# Altium PCB PCB_Nixie Clock Component_2021-09-03.pcbdoc
Units mil, origin at the board's own origin, x right, y up, seen from the top; angles counter-clockwise.
Board outline 6186.6 x 3360.23 mil, 2 copper layers (Top Layer, Bottom Layer); 27 components, 69 nets, 164 pads, 28 vias.
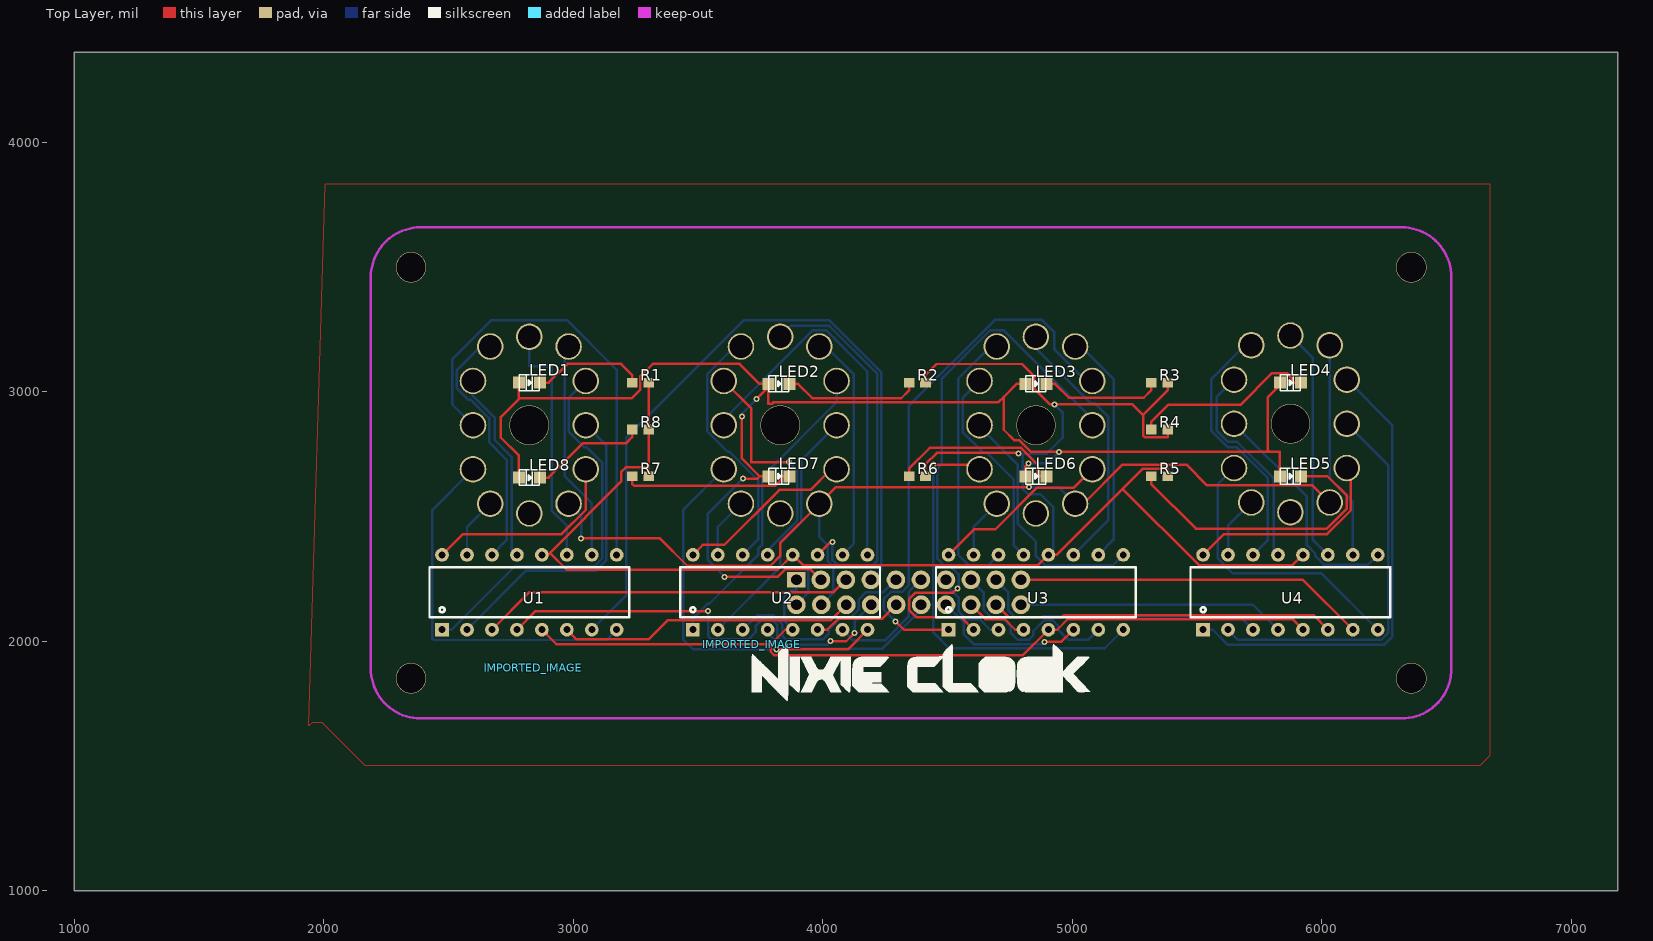
[diagram p0: Top Layer view]
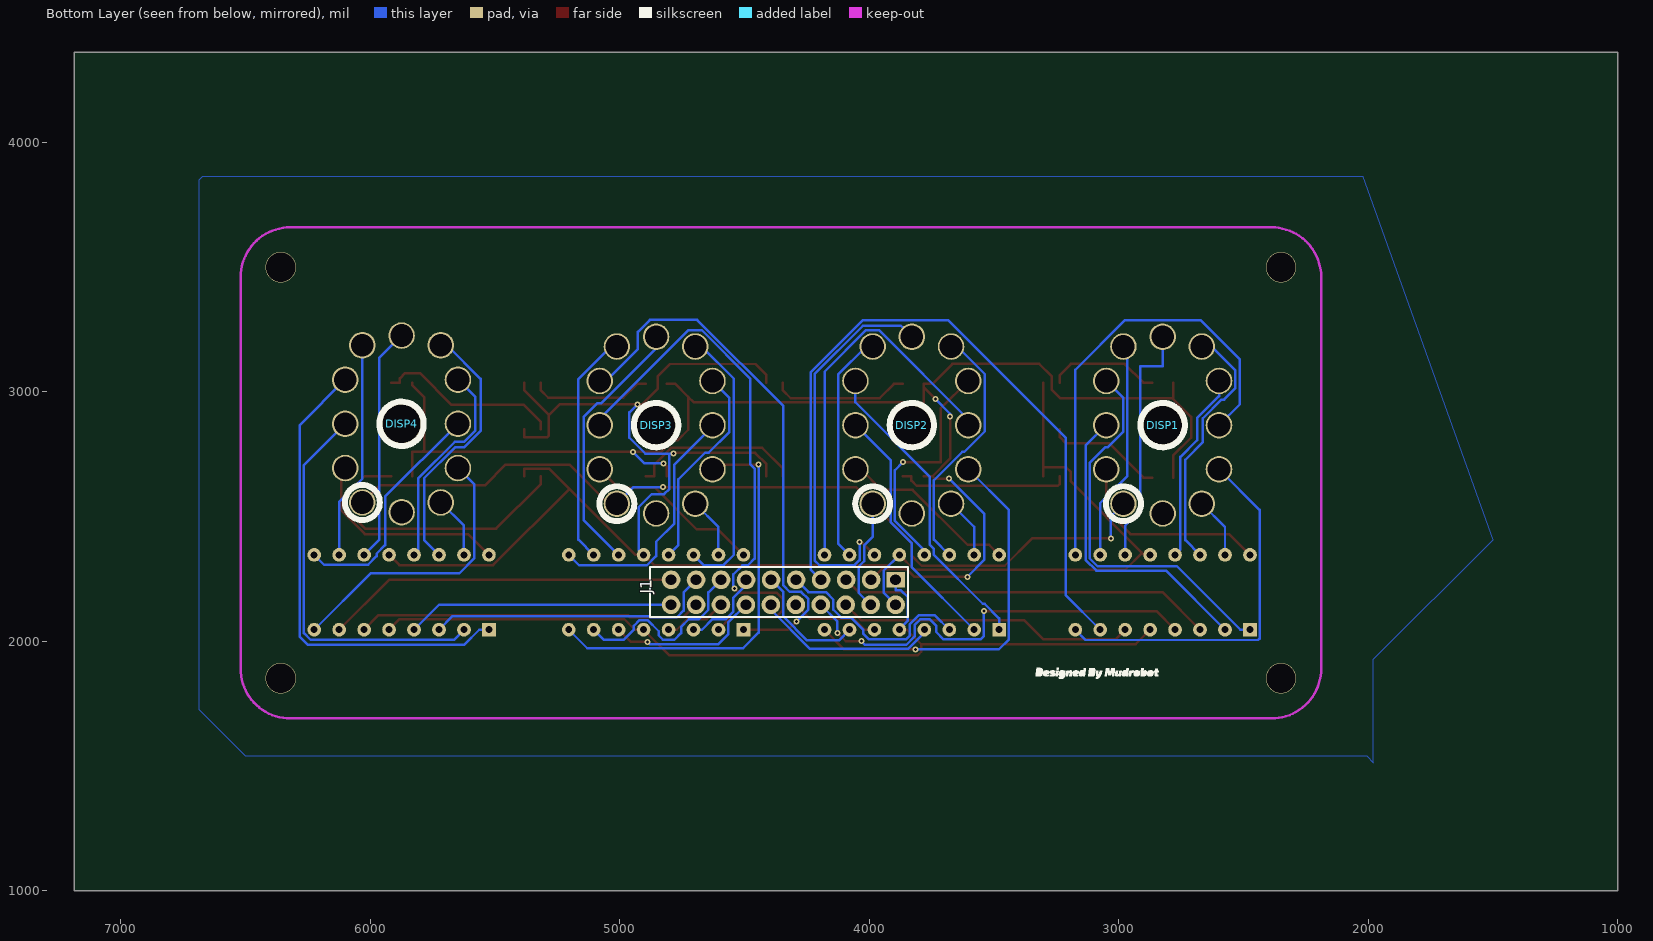
[diagram p1: Bottom Layer view, seen from below]

## Layer stack, top to bottom
Top Layer: signal copper (thickness not stored)
Dielectric: dielectric 12.6, FR-4, Dk 4.8
Bottom Layer: signal copper (thickness not stored)

## Board outline
7186.6,1000 1000,1000 1000,4360.23 7186.6,4360.23

## Components (designator, comment, footprint, x,y, rotation, side; value= is the part's Value field where it differs from the comment)
DISP1 "DISP_IN12A" "IN12A FINAL EDITION" 2824.41,2865.51 r0 bottom
DISP2 "DISP_IN12A" "IN12A FINAL EDITION" 3829.41,2865.51 r0 bottom
DISP3 "DISP_IN12A" "IN12A FINAL EDITION" 4854.41,2865.51 r0 bottom
DISP4 "DISP_IN12A" "IN12A FINAL EDITION" 5874.41,2870.51 r0 bottom
IMPORTED_IMAGE "IMPORTED_IMAGE" IMPORTED_IMAGE 2839.68,1892.71 r0 top
IMPORTED_IMAGE "IMPORTED_IMAGE" IMPORTED_IMAGE 3715.2,1987.84 r0 top
J1 "2.54MM,2×10双排针" 2*10P 4304.41,2220.51 r270 bottom
LED1 "17-21/BHC-AP1Q2/3T" LED_0805 2824.41,3035.51 r0 top
LED2 "17-21/BHC-AP1Q2/3T" LED_0805 3824.41,3030.51 r0 top
LED3 "17-21/BHC-AP1Q2/3T" LED_0805 4854.41,3030.51 r0 top
LED4 "17-21/BHC-AP1Q2/3T" LED_0805 5874.41,3035.51 r0 top
LED5 "17-21/BHC-AP1Q2/3T" LED_0805 5874.41,2660.51 r0 top
LED6 "17-21/BHC-AP1Q2/3T" LED_0805 4854.41,2660.51 r0 top
LED7 "17-21/BHC-AP1Q2/3T" LED_0805 3824.41,2660.51 r0 top
LED8 "17-21/BHC-AP1Q2/3T" LED_0805 2824.41,2655.51 r0 top
R1 "510" 0603-RES 3269.41,3035.51 r0 top
R2 "510" 0603-RES 4379.41,3035.51 r0 top
R3 "510" 0603-RES 5349.41,3035.51 r0 top
R4 "510" 0603-RES 5349.41,2848.01 r0 top
R5 "510" 0603-RES 5349.41,2660.51 r0 top
R6 "510" 0603-RES 4379.41,2660.51 r0 top
R7 "510" 0603-RES 3269.41,2660.51 r0 top
R8 "510" 0603-RES 3269.41,2848.01 r0 top
U1 "K155ID1/SN74141" DIP16 2824.41,2195.51 r0 top
U2 "K155ID1/SN74141" DIP16 3829.41,2195.51 r0 top
U3 "K155ID1/SN74141" DIP16 4854.41,2195.51 r0 top
U4 "K155ID1/SN74141" DIP16 5874.41,2195.51 r0 top

## Footprints (in the part's own frame and the unit in brackets; to place one, negate y for a bottom-side part, rotate by r counter-clockwise, add the part's x,y. Pads: shape width x height; smd on the part's side, far side on the other; paste and mask are expansions set on the pad)
2*10P [mm]
  rect 1.575x1.9 hole 1.1: 1(-0.635,10.414)
  round 1.9 hole 1.1: 2(1.905,10.414) 3(-0.635,7.919) 4(1.905,7.874) 5(-0.635,5.373) 6(1.905,5.334) 7(-0.635,2.828) 8(1.905,2.794) 9(-0.635,0.282) 10(1.905,0.254) 11(-0.635,-2.263) 12(1.905,-2.286) 13(-0.635,-4.809) 14(1.905,-4.826) 15(-0.635,-7.355) 16(1.905,-7.366) 17(-0.635,-9.9) 18(1.905,-9.906) 19(-0.635,-12.446) 20(1.905,-12.446)
  silkscreen extent -1.93,-14.6 3.15,11.66
0603-RES [mil]
  rect 43.3x39.4 smd: 1(-33,0) 2(33,0)
DIP16 [mil]
  rect 55x55 hole 28: 1(-350,-150)
  round 55 hole 28: 2(-250,-150) 3(-150,-150) 4(-50,-150) 5(50,-150) 6(150,-150) 7(250,-150) 8(350,-150) 9(350,150) 10(250,150) 11(150,150) 12(50,150) 13(-50,150) 14(-150,150) 15(-250,150) 16(-350,150)
  silkscreen extent -400,-100 400,100
IMPORTED_IMAGE [mil]
"IN12A FINAL EDITION" [mil]
  round 106.3 hole 90.6: 1(157,315) 2(226,177) 3(226,0) 4(226,-177) 5(157,-315) 6(0,-354) 7(-157,-315) 8(-226,-177) 9(-226,0) 10(-226,177) 11(-157,315) 12(0,354)
  silkscreen extent -89,-89 227,385
LED_0805 [mil]
  rect 48x48 smd: 1(-42,0) 2(42,0)
  silkscreen extent -40,-32 40,32

## Via types
v1: diameter 24.02, hole 12.01, Top Layer to Bottom Layer, 18 vias
v2: diameter 157.48, hole 153.54, Top Layer to Bottom Layer, 4 vias
v3: diameter 122.05, hole 118.11, Top Layer to Bottom Layer, 4 vias
v4: diameter 24, hole 12, Top Layer to Bottom Layer, 2 vias

## Nets (pads, with @x,y where several pads share a name; then routed paths per layer and width w, separated by ;. In a path a pad name is that pad's centre, name@x,y a point inside that pad or via, vN(x,y) a via of type N, cw(c..) or ccw(c..) an arc to the next point about the centre after c; other vN are vias at no path point)
+5V: J1.1 U1.5 U2.5 U3.5 U4.5 | length 3545.5
  Top Layer w10: U1.5 2932.71,1987.21 3791.55,1987.21 ; U2.5 3849.85,2045.51 3791.55,1987.21 ; U4.5 5882.25,2087.67 4981.93,2087.67 4939.77,2045.51 U3.5 4802.55,1943.65 3805.07,1943.65 3791.55,1957.17 3791.55,1987.21
  Bottom Layer w10: U2.5 3879.41,2048.86 3845.51,2082.76 3845.51,2175.57 3873.38,2203.44 3894.41,2203.44 J1.1
GND: J1.2 R1.2 R2.2 R3.2 R4.2 R5.2 R6.2 R7.2 R8.2 U1.12 U2.12 U3.12 U4.12 | length 7540.6
  Top Layer w10: U1.12 2898.25,2345.51 2906.5,2353.76 ; R7.2 3302.41,2696.62 ; R1.2 R8.2 3302.41,2696.62 ; R6.2 4412.41,2691.28 4412.41,2709.23 4457.46,2754.28 4780.66,2754.28 v1(4784.09,2750.85) ; R2.2 4412.41,3066.28 4456.57,3110.44 4799.03,3110.44 4847.49,3061.98 4847.49,3012.07 4911.25,2948.31 v1(4929.51,2948.31) 5241.4,2948.31 5283.69,2906.02 ; R5.2 5382.41,2691.28 5283.24,2691.28 5201.76,2609.8 ; R4.2 5382.41,2817.24 5290.18,2817.24 5283.69,2823.73 5283.69,2906.02 ; R3.2 5382.41,3004.74 5283.69,2906.02 ; U4.12 5883.08,2304.18 5507.38,2304.18 5201.76,2609.8 ; 2906.5,2353.76 3192.28,2639.54 3192.28,2677.63 3211.27,2696.62 3302.41,2696.62 ; 2906.5,2353.76 2974.28,2285.98 3819.88,2285.98 U2.12 3920.48,2304.44 4863.34,2304.44 U3.12 4937.47,2345.51 5201.76,2609.8
  Bottom Layer w10: U2.12 3942.89,2282.03 3942.89,2193.99 J1.2 ; U3.12 4924.14,2365.24 4924.14,2536.46 4871.83,2588.77 4822.3,2588.77 4801,2610.07 4801,2750.85 v1(4784.09,2750.85) 4897.31,2750.85 4961.41,2814.96 4961.41,2916.41 v1(4929.51,2948.31)
H1_0: DISP2.2 U2.16 | length 718.1
  Top Layer w10: U2.16 3519.78,2385.88 3606.24,2385.88 3826.65,2606.29 3951.36,2606.29 4033.58,2688.51 DISP2.2
H1_1: DISP2.11 U2.15 | length 243.5
  Bottom Layer w10: U2.15 3579.41,2457.51 DISP2.11
H1_2: DISP2.10 U2.8 | length 1536.8
  Top Layer w10: v1(3814.63,1966.73) 4100.63,1966.73 U2.8
  Bottom Layer w10: DISP2.10 3440.83,2525.93 3440.83,2006.93 3481.02,1966.74 v1(3814.63,1966.73)
H1_3: DISP2.9 U2.9 | length 1550.2
  Bottom Layer w10: DISP2.9 3603.41,2888.34 3961.44,3246.37 4012.4,3246.37 4179.41,3079.36 U2.9
H1_4: DISP2.8 U2.13 | length 956.4
  Top Layer w10: DISP2.8 3713.78,2932.15 3713.78,2717.32 v1(3864.96,2717.32)
  Bottom Layer w10: U2.13 3779.41,2363.77 3897.66,2482.03 3897.66,2684.62 v1(3864.96,2717.32)
H1_5: DISP2.7 U2.14 | length 1020.2
  Bottom Layer w10: DISP2.7 3647.6,3180.51 3537.12,3070.03 3537.12,2840.24 3618.58,2758.78 3626.75,2758.78 3740.83,2644.7 3740.83,2406.93 U2.14
H1_6: DISP2.6 U2.11 | length 1584.9
  Top Layer w10: U2.11 4031.39,2397.49 v1(4038.88,2397.49)
  Bottom Layer w10: DISP2.6 3873.54,3263.64 4025.19,3263.64 4218.95,3069.88 4218.95,2323.03 4200.43,2304.51 4058.96,2304.51 4038.88,2324.59 v1(4038.88,2397.49)
H1_7: DISP2.5 U2.10 | length 926
  Bottom Layer w10: DISP2.5 4012.04,3180.51 4124.66,3067.89 4124.66,2390.76 U2.10
H1_8: DISP2.4 U2.1 | length 1239.7
  Bottom Layer w10: U2.1 3479.41,2084.08 3479.41,2091.11 3538.11,2149.71 3545.11,2149.71 3740.81,2345.51 3740.81,2369.61 3757.91,2386.71 3757.91,2659.51 4055.41,2957.01 DISP2.4
H1_9: DISP2.3 U2.2 | length 1017.2
  Bottom Layer w10: U2.2 3829.41,2295.51 3829.41,2391.01 3913.75,2475.35 3913.75,2723.85 DISP2.3
H1_A: J1.9 U2.3 | length 836.4
  Bottom Layer w10: U2.3 3737.12,2103.22 3802.29,2103.22 3837.4,2068.11 3837.4,2022.14 3852.61,2006.93 4001.87,2006.93 4023.69,2028.75 4023.69,2045.17 4072.9,2094.38 4112.39,2094.38 4144.41,2126.4 4144.41,2166.33 4174.25,2196.17 4243.96,2196.17 J1.9
H1_B: J1.10 U2.6 | length 356.4
  Top Layer w10: U2.6 4017.18,2045.51 4060.61,2088.94 4237.84,2088.94 J1.10
H1_C: J1.11 U2.7 | length 489.7
  Bottom Layer w10: U2.7 4121.94,2002.98 4249.14,2002.98 4344.41,2098.25 4344.41,2196.4 J1.11
H1_D: J1.12 U2.4 | length 738.2
  Bottom Layer w10: U2.4 3779.41,2034.6 3845.34,1968.67 4237.59,1968.67 4394.41,2125.49 J1.12
H2_0: DISP1.2 U1.16 | length 813.4
  Top Layer w10: U1.16 2557.74,2428.84 2953.51,2428.84 3050.41,2525.74 DISP1.2
H2_1: DISP1.11 U1.15 | length 243.5
  Bottom Layer w10: U1.15 2574.41,2457.51 DISP1.11
H2_2: DISP1.10 U1.8 | length 1503.9
  Bottom Layer w10: DISP1.10 2435.83,2525.93 2435.83,2009.86 2441.37,2004.32 3133.22,2004.32 U1.8
H2_3: DISP1.9 U1.9 | length 1846.2
  Bottom Layer w10: DISP1.9 2514.77,2949.15 2514.77,3127.75 2673.42,3286.4 2974.79,3286.4 3174.41,3086.78 U1.9
H2_4: DISP1.8 U1.13 | length 769.9
  Bottom Layer w10: DISP1.8 2598.41,2981.51 2686.22,2893.7 2686.22,2804.72 2753.15,2737.79 2753.15,2366.78 U1.13
H2_5: DISP1.7 U1.14 | length 1026.7
  Bottom Layer w10: DISP1.7 2628.51,3180.51 2532.71,3084.21 2532.71,3013.81 2578.31,2968.11 2587.81,2968.11 2663.01,2892.91 2663.01,2797.21 2733.51,2726.81 2733.51,2404.61 U1.14
H2_6: DISP1.6 U1.11 | length 989.2
  Bottom Layer w10: DISP1.6 2824.41,3100.81 2914.91,3100.81 2914.91,2521.61 2974.41,2462.21 U1.11
H2_7: DISP1.5 U1.10 | length 886.9
  Bottom Layer w10: DISP1.5 2965.32,3164.42 2965.32,2661.76 3074.41,2552.67 U1.10
H2_8: DISP1.4 U1.1 | length 1561.3
  Bottom Layer w10: U1.1 2512.98,2045.51 2767.27,2299.8 3084.68,2299.8 3116.72,2331.84 3116.72,2713.04 3052.75,2777.01 3044.07,2777.01 2981.41,2839.67 2981.41,2973.51 DISP1.4
H2_9: DISP1.3 U1.2 | length 1248.7
  Bottom Layer w10: U1.2 2811.08,2282.18 3089.82,2282.18 3132.81,2325.17 3132.81,2783.11 DISP1.3
H2_A: J1.5 U1.3 | length 1501.3
  Top Layer w10: U1.3 2825.19,2196.29 4043.63,2196.29 J1.5
H2_B: J1.6 U1.6 | length 1193.4
  Top Layer w10: U1.6 3012.99,2006.93 3302.24,2006.93 3379.4,2084.09 4032.99,2084.09 J1.6
H2_C: J1.7 U1.7 | length 2978.5
  Bottom Layer w10: U1.7 3212.99,2184.09 3212.99,2815.13 3682.86,3285 4026.59,3285 4235.04,3076.55 4235.04,2287.47 J1.7
H2_D: J1.8 U1.4 | length 1766.1
  Top Layer w10: U1.4 2848.77,2119.87 v1(3540.83,2119.87) ; v1(4031.43,1999.4) 4094.34,1999.4 v1(4127.38,2032.44)
  Bottom Layer w10: v1(3540.83,2119.87) 3540.83,2021.05 3554.95,2006.93 3701.87,2006.93 3732.42,2037.48 3732.42,2062.31 3757.24,2087.13 3795.62,2087.13 3817.98,2064.77 3817.98,2018.79 3852.01,1984.76 4016.79,1984.76 v1(4031.43,1999.4) ; v1(4127.38,2032.44) 4127.38,2078.48 J1.8
HV: DISP1.1 DISP2.1 DISP3.1 DISP4.1 J1.4 | length 3970.3
  Top Layer w10: v1(3031.51,2411.21) 3347.79,2411.21 3456.93,2302.07 3790.63,2302.07 3829.42,2340.86 3829.42,2393.52 DISP2.1 4052.9,2617 v1(4827.24,2617) ; DISP3.1 5044.38,2550.51 5201.35,2707.48 5457.16,2707.48 5540.36,2624.28 5962.63,2624.28 DISP4.1
  Bottom Layer w10: DISP1.1 3031.51,2500.41 v1(3031.51,2411.21) ; DISP2.1 3986.41,2417.32 4020.92,2382.81 4020.92,2319.78 4042.74,2297.96 4042.74,2193.84 J1.4 ; v1(4827.24,2617) 4944.91,2617 DISP3.1
LED0: J1.3 LED1.1 LED2.1 LED3.1 LED4.1 LED5.1 LED6.1 LED7.1 LED8.1 | length 6117.8
  Top Layer w10: LED8.1 2782.41,2743.17 2710.63,2814.96 2710.63,2898.42 2782.41,2970.21 LED1.1 2782.41,2972.36 3234.38,2972.36 3269.68,3007.66 3269.68,3061.88 3318.76,3110.96 3666.89,3110.96 3747.34,3030.51 LED2.1 ; v1(3607.36,2257.47) 3818.94,2257.47 3849.06,2287.59 3950.55,2287.59 J1.3 ; v4(3675.98,2899.6) 3675.98,2731.89 3747.36,2660.51 ; v1(3680.43,2651.05) 3737.88,2651.05 3747.34,2660.51 ; v4(3734.64,2969.68) 3782.41,3017.45 LED2.1 ; 3796.81,2950.81 3802.31,2956.31 4703.11,2956.31 4725.91,2979.11 4777.34,3030.51 LED3.1 ; 3796.91,2950.81 3782.67,2950.78 LED2.1 ; 4725.58,2976.38 4725.58,2846.85 4767.32,2805.11 4787.4,2805.11 4834.34,2758.17 v1(4946.81,2758.17) 5832.41,2758.17 LED5.1 ; LED6.1 4812.41,2700.5 v1(4824.08,2712.17) ; 5789.71,2761.01 5783.81,2761.01 5783.81,2977.91 5832.41,3026.51 LED4.1 ; 3747.36,2660.51 LED7.1 3747.34,2660.51
  Bottom Layer w10: v1(3607.36,2257.47) 3538.7,2326.13 3538.7,2509.32 v1(3680.43,2651.05) ; v4(3675.98,2899.6) 3675.98,2911.02 v4(3734.64,2969.68) ; v1(4824.08,2712.17) 4900.81,2712.17 v1(4946.81,2758.17)
LED1_2: LED1.2 R1.1 | length 450.5
  Top Layer w10: LED1.2 2901.48,3035.51 2976.95,3110.98 3191.71,3110.98 3236.41,3066.28 R1.1
LED2_2: LED2.2 R2.1 | length 547.6
  Top Layer w10: LED2.2 3901.48,3030.51 3958.85,2973.14 4314.81,2973.14 4346.41,3004.74 R2.1
LED3_2: LED3.2 R3.1 | length 486
  Top Layer w10: LED3.2 4931.48,3030.51 4986.91,2975.08 5286.75,2975.08 5316.41,3004.74 R3.1
LED4_2: LED4.2 R4.1 | length 738
  Top Layer w10: R4.1 5316.41,2878.78 5384.49,2946.86 5673.77,2946.86 5801.12,3074.21 5860.17,3074.21 5881.34,3053.04 5881.34,3035.51 LED4.2
M1_0: DISP4.2 U4.16 | length 842.1
  Top Layer w10: U4.16 5607.73,2428.83 6021.16,2428.83 6116.49,2524.16 6116.49,2677.42 DISP4.2
M1_1: DISP4.11 U4.15 | length 248.5
  Bottom Layer w10: U4.15 5624.41,2462.52 DISP4.11
M1_2: DISP4.10 U4.8 | length 1149.3
  Bottom Layer w10: DISP4.10 5582.49,2627.6 5582.49,2332.18 5643.1,2271.57 5998.35,2271.57 U4.8
M1_3: DISP4.9 U4.9 | length 945.9
  Bottom Layer w10: DISP4.9 5940.25,2578.66 5940.25,2384.24 5974.42,2350.07 5974.42,2340.25 6008.76,2305.91 6184.81,2305.91 U4.9
M1_4: DISP4.8 U4.13 | length 854.2
  Bottom Layer w10: DISP4.8 5578.71,2977.82 5578.71,2843.92 5624.54,2798.09 5661.29,2798.09 5808.26,2651.12 5808.26,2361.66 U4.13
M1_5: DISP4.7 U4.14 | length 1060.7
  Bottom Layer w10: DISP4.7 5692.79,3185.51 5557.66,3050.38 5557.66,2842.2 5623.52,2776.34 5660.28,2776.34 5784.13,2652.49 5784.13,2405.23 U4.14
M1_6: DISP4.6 U4.11 | length 941.1
  Bottom Layer w10: DISP4.6 5964.38,3134.53 5964.38,2405.54 U4.11
M1_7: DISP4.5 U4.10 | length 878.5
  Bottom Layer w10: DISP4.5 6031.4,2650.69 6124.41,2557.68 U4.10
M1_8: DISP4.4 U4.1 | length 1900.6
  Bottom Layer w10: U4.1 5562.98,2045.51 5622.31,1986.18 6251.1,1986.18 6282.02,2017.1 6282.02,2865.89 DISP4.4
M1_9: DISP4.3 U4.2 | length 1576.2
  Bottom Layer w10: U4.2 5664.95,2004.97 6238.47,2004.97 6265.79,2032.29 6265.79,2705.12 DISP4.3
M1_A: J1.17 U4.3 | length 1159.7
  Bottom Layer w10: J1.17 4744.3,2195.4 4744.3,2122.48 4771.35,2095.43 4877.03,2095.43 4881.77,2100.17 5669.75,2100.17 U4.3
M1_B: J1.18 U4.6 | length 1378.1
  Top Layer w10: J1.18 4744.2,2095.72 4959.16,2095.72 4967.2,2103.76 5966.16,2103.76 U4.6
M1_C: J1.19 U4.7 | length 1412.8
  Top Layer w10: J1.19 5924.41,2245.51 U4.7
M1_D: J1.20 U4.4 | length 1071.4
  Bottom Layer w10: J1.20 5724.41,2145.51 U4.4
M2_0: DISP3.2 U3.16 | length 718.1
  Top Layer w10: U3.16 4606.2,2447.3 4691.48,2447.3 4858.92,2614.74 5006.63,2614.74 DISP3.2
M2_1: DISP3.11 U3.15 | length 243.5
  Bottom Layer w10: U3.15 4604.41,2457.52 DISP3.11
M2_2: DISP3.10 U3.8 | length 1684.3
  Top Layer w10: v1(4443.32,2707.5) 4609.41,2707.5 DISP3.10
  Bottom Layer w10: v1(4443.32,2707.5) 4443.32,2033.68 4505.56,1971.44 5130.34,1971.44 U3.8
M2_3: DISP3.9 U3.9 | length 1001.3
  Bottom Layer w10: DISP3.9 4628.4,2859.71 4780.73,2707.38 4780.73,2471.94 4854.42,2398.25 4854.42,2340.69 4891.65,2303.46 5162.36,2303.46 U3.9
M2_4: DISP3.8 U3.13 | length 834.6
  Bottom Layer w10: DISP3.8 4560.42,2974.53 4560.42,2838.29 4643.83,2754.88 4658.13,2754.88 4764.62,2648.39 4764.62,2385.3 U3.13
M2_5: DISP3.7 U3.14 | length 1108.9
  Bottom Layer w10: DISP3.7 4671.82,3180.51 4542.99,3051.68 4542.99,2345.78 4583.94,2304.83 4663.73,2304.83 U3.14
M2_6: DISP3.6 U3.11 | length 1061.8
  Bottom Layer w10: DISP3.6 4854.4,3172.79 5073.18,2954.01 5089.32,2954.01 5144.74,2898.59 5144.74,2485.84 U3.11
M2_7: DISP3.5 U3.10 | length 938.4
  Bottom Layer w10: DISP3.5 5035.24,3180.51 5165.83,3049.92 5165.83,2406.93 U3.10
M2_8: DISP3.4 U3.1 | length 2197.6
  Top Layer w10: v1(4292.38,2078.91) 4325.78,2045.51 U3.1
  Bottom Layer w10: v1(4292.38,2078.91) 4244.41,2126.88 4244.41,2168.29 4273.15,2197.03 4318.71,2197.03 4344.43,2222.75 4344.43,2941.74 4689.93,3287.24 4879.02,3287.24 4926.9,3239.36 4926.9,3170.3 5054.69,3042.51 DISP3.4
M2_9: DISP3.3 U3.2 | length 2300.3
  Top Layer w10: v1(4539.64,2211.37) 4522.26,2193.99 4371.78,2193.99 4345.93,2168.14 4345.93,2124.45 4374.12,2096.26 4553.66,2096.26 U3.2
  Bottom Layer w10: v1(4539.64,2211.37) 4545.15,2216.88 4545.15,2267.15 4508.82,2303.48 4486.91,2303.48 4459.73,2330.66 4459.73,2691.26 4477.79,2709.32 4477.79,3052.33 4671.45,3245.99 4724.51,3245.99 5080.4,2890.1 DISP3.3
M2_A: J1.13 U3.3 | length 338.4
  Bottom Layer w10: J1.13 4493.74,2224.64 4544.41,2173.97 4544.41,2118.28 4575.02,2087.67 4628.59,2087.67 4670.75,2045.51 U3.3
M2_B: J1.14 U3.6 | length 627.2
  Top Layer w10: v1(4888.34,1996.43) 4955.33,1996.43 U3.6
  Bottom Layer w10: J1.14 4565.83,2074.09 4565.83,2026.75 4605.05,1987.53 4879.44,1987.53 v1(4888.34,1996.43)
M2_C: J1.15 U3.7 | length 765.4
  Bottom Layer w10: J1.15 4644.41,2195.07 4644.41,2125.58 4682.6,2087.39 4723.57,2087.39 4754.41,2056.55 4754.41,2031.73 4780.82,2005.32 4826.76,2005.32 4843.82,2022.38 4843.82,2039.46 4888.44,2084.08 4920.39,2084.08 4942.98,2061.49 4942.98,2046.32 4983.3,2006 5064.9,2006 U3.7
M2_D: J1.16 U3.4 | length 251.4
  Top Layer w10: J1.16 4652.25,2087.67 4729.48,2087.67 4771.64,2045.51 U3.4
R5_1: LED5.2 R5.1 | length 1190.2
  Top Layer w10: R5.1 5316.41,2629.74 5495.42,2450.73 6020.3,2450.73 6100.4,2530.83 6100.4,2582.72 6022.61,2660.51 LED5.2
R6_1: LED6.2 R6.1 | length 689.6
  Top Layer w10: R6.1 4346.41,2691.28 4429.09,2773.96 4794.94,2773.96 4861.34,2707.56 4861.34,2660.51 LED6.2
R7_1: LED7.2 R7.1 | length 689.9
  Top Layer w10: R7.1 3236.41,2629.74 3243.76,2622.39 3810.75,2622.39 3831.34,2642.98 3831.34,2660.51 LED7.2
R8_1: LED8.2 R8.1 | length 467.8
  Top Layer w10: LED8.2 2901.48,2655.51 3037.95,2791.98 3211.15,2791.98 3236.41,2817.24 R8.1
S$2821: 
pads on no net: DISP1.12 DISP2.12 DISP3.12 DISP4.12
copper on no net:
  other v2: 2824.41,2865.51 3829.41,2865.51 4854.4,2865.51 5874.4,2870.51
  other v3: 2350,1850.79 6359.45,1850.79 2350,3498.03 6359.45,3498.03

## Polygon pours and split planes (outlines as drawn)
GND on Bottom Layer (solid): 2020.08,3860.23 6673.22,3860.23 6686.6,3846.84 6686.6,1726.77 6499.99,1540.16 2006.69,1540.16 1979.92,1513.38 1979.92,1926.77 1500,2406.69
GND on Top Layer (solid): 2006.69,3833.46 6673.22,3833.46 6673.22,1539.76 6633.45,1500 2166.93,1500 1993.31,1673.62 1953.54,1673.62 1940.16,1660.24

## Keep-outs
Keep-Out Layer:
  lines w10: 2188.97,1889.76 ccw(c2388.97,1889.76) 2388.97,1689.76 ; 2188.97,3458.27 cw(c2388.97,3458.27) 2388.97,3658.27 ; 6319.68,1689.76 ccw(c6319.68,1889.76) 6519.68,1889.76 ; 6319.68,3658.27 cw(c6319.68,3458.27) 6519.68,3458.27